# Altium PCB PCB_Heart-Earrings-1.5_2025-02-14.pcbdoc
Units mil, origin at the board's own origin, x right, y up, seen from the top; angles counter-clockwise.
Board outline 1885.82 x 2200.78 mil, 2 copper layers (Top Layer, Bottom Layer); 84 components, 34 nets, 213 pads, 61 vias.
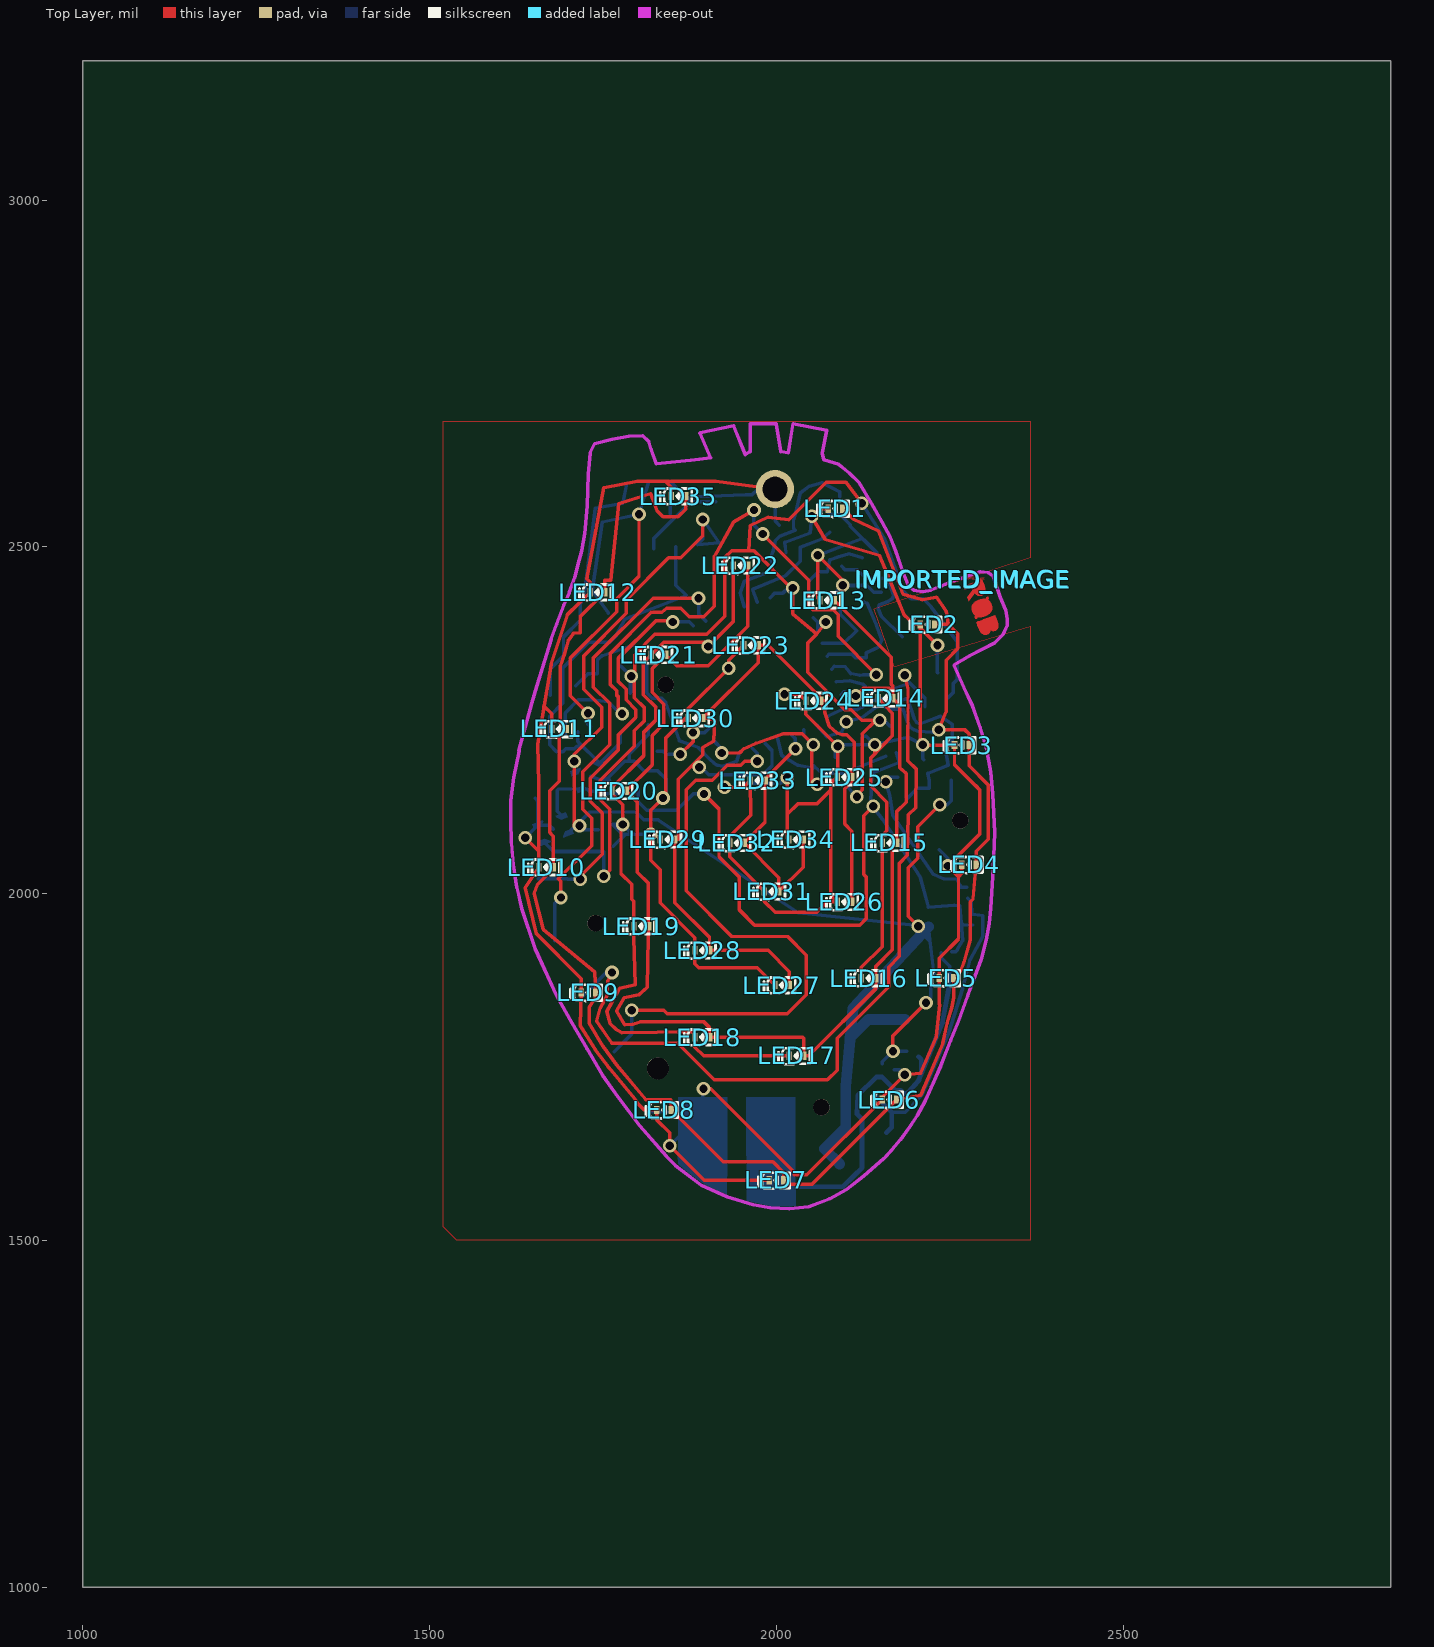
[diagram p0: Top Layer view]
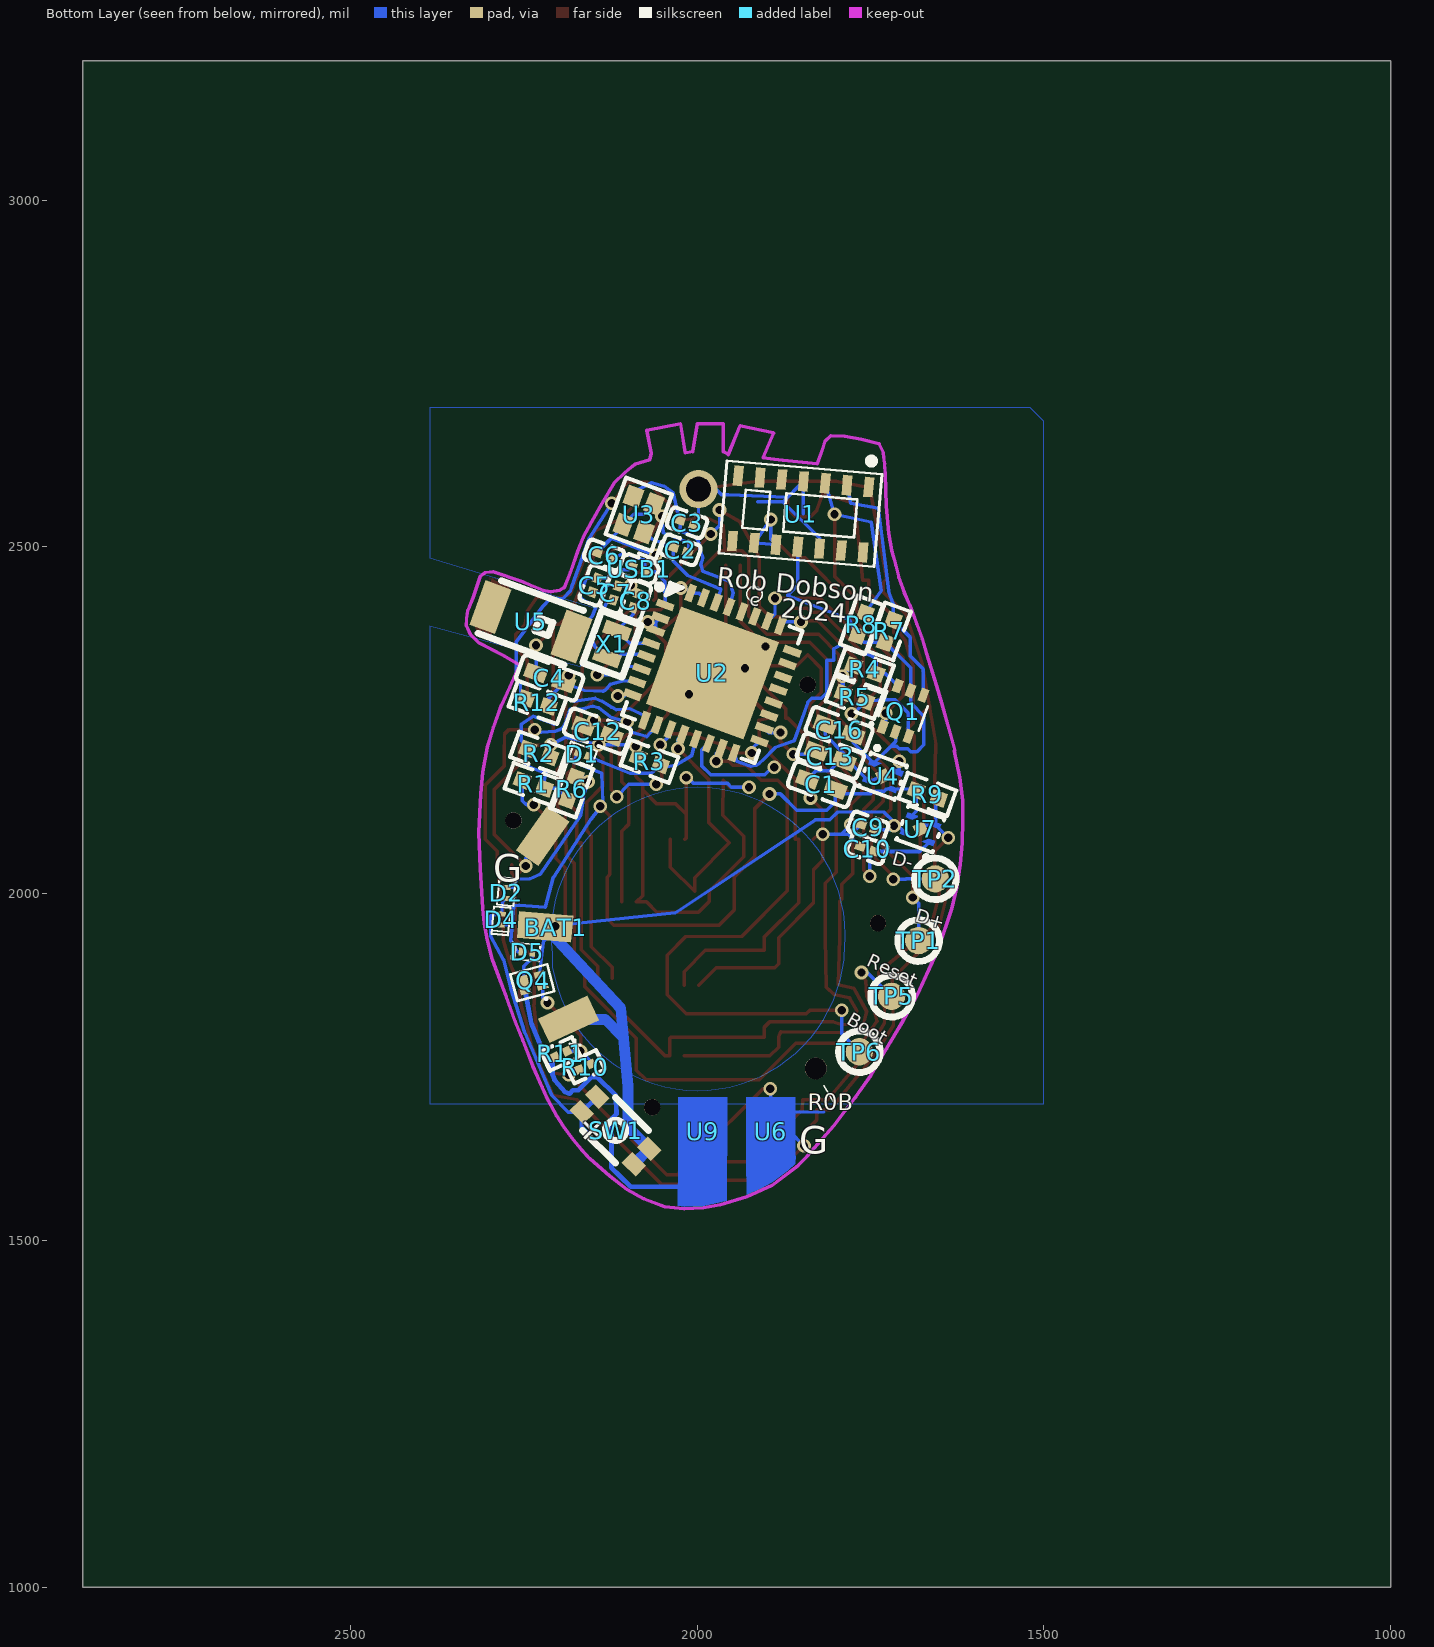
[diagram p1: Bottom Layer view, seen from below]

## Layer stack, top to bottom
Top Layer: signal copper (thickness not stored)
Dielectric: dielectric 12.6, FR-4, Dk 4.8
Bottom Layer: signal copper (thickness not stored)

## Board outline
2885.82,1000 1000,1000 1000,3200.78 2885.82,3200.78

## Components (designator, comment, footprint, x,y, rotation, side; value= is the part's Value field where it differs from the comment)
BAT1 "CP1154 li-ion" CP1154_LI_ION_NO_SILK 2000,1933.08 r95 bottom
C1 "1uF" C0402 1820.87,2157.48 r20 bottom
C2 "10pF" C0201 2024.02,2495.67 r200 bottom
C3 "10pF" C0201 2014.57,2534.64 r200 bottom
C4 "1uF" C0402 2212.6,2311.02 r20 bottom
C5 "10pF" C0201 2147.64,2444.49 r290 bottom
C6 "10pF" C0201 2134.25,2488.19 r20 bottom
C7 "10pF" C0201 2117.72,2433.46 r110 bottom
C8 "10pF" C0201 2088.58,2422.44 r290 bottom
C9 "1uF" C0201 1753.54,2096.06 r20 bottom
C10 "100nF" C0201 1754.72,2064.57 r20 bottom
C12 "100nF" C0402 2143.7,2234.25 r200 bottom
C13 "1uF" C0402 1808.11,2198.15 r200 bottom
C16 "1uF" C0402 1795.28,2236.22 r20 bottom
D1 "BAT30F4-MS" X3-DFN0603-2_L0.6-W0.3-RD 2165.35,2200.79 r20 bottom
D2 "BAT30F4-MS" X3-DFN0603-2_L0.6-W0.3-RD 2275.2,2001.18 r95 bottom
D4 "BAT30F4-MS" X3-DFN0603-2_L0.6-W0.3-RD 2282.68,1962.6 r275 bottom
D5 "BAT30F4-MS" X3-DFN0603-2_L0.6-W0.3-RD 2245.27,1915.75 r5 bottom
IMPORTED_IMAGE "IMPORTED_IMAGE" IMPORTED_IMAGE#1 2268.01,2454.02 r0 top
IMPORTED_IMAGE "IMPORTED_IMAGE" IMPORTED_IMAGE#2 2269.61,2452.82 r0 top
LED1 "XL-0201SURC" LED-SMD_L0.7-W0.4-RD 2085.04,2555.12 r0 top
LED2 "XL-0201SURC" LED-SMD_L0.7-W0.4-RD 2218.11,2388.15 r0 top
LED3 "XL-0201SURC" LED-SMD_L0.7-W0.4-RD 2267.32,2214.17 r0 top
LED4 "XL-0201SURC" LED-SMD_L0.7-W0.4-RD 2277.95,2041.73 r0 top
LED5 "XL-0201SURC" LED-SMD_L0.7-W0.4-RD 2245.27,1878.35 r0 top
LED6 "XL-0201SURC" LED-SMD_L0.7-W0.4-RD 2163.11,1703.15 r0 top
LED7 "XL-0201SURC" LED-SMD_L0.7-W0.4-RD 2000,1586.61 r0 top
LED8 "XL-0201SURC" LED-SMD_L0.7-W0.4-RD 1838.11,1688.15 r0 top
LED9 "XL-0201SURC" LED-SMD_L0.7-W0.4-RD 1729.13,1857.48 r0 top
LED10 "XL-0201SURC" LED-SMD_L0.7-W0.4-RD 1668.11,2038.15 r0 top
LED11 "XL-0201SURC" LED-SMD_L0.7-W0.4-RD 1686.61,2237.4 r0 top
LED12 "XL-0201SURC" LED-SMD_L0.7-W0.4-RD 1742.13,2434.64 r0 top
LED13 "XL-0201SURC" LED-SMD_L0.7-W0.4-RD 2073.11,2423.15 r0 top
LED14 "XL-0201SURC" LED-SMD_L0.7-W0.4-RD 2157.48,2281.49 r0 top
LED15 "XL-0201SURC" LED-SMD_L0.7-W0.4-RD 2163.11,2073.15 r0 top
LED16 "XL-0201SURC" LED-SMD_L0.7-W0.4-RD 2133.11,1878.15 r0 top
LED17 "XL-0201SURC" LED-SMD_L0.7-W0.4-RD 2029.13,1766.14 r0 top
LED18 "XL-0201SURC" LED-SMD_L0.7-W0.4-RD 1893.11,1793.15 r0 top
LED19 "XL-0201SURC" LED-SMD_L0.7-W0.4-RD 1805.12,1953.15 r0 top
LED20 "XL-0201SURC" LED-SMD_L0.7-W0.4-RD 1773.11,2148.15 r0 top
LED21 "XL-0201SURC" LED-SMD_L0.7-W0.4-RD 1830.31,2344.49 r0 top
LED22 "XL-0201SURC" LED-SMD_L0.7-W0.4-RD 1948.11,2473.15 r0 top
LED23 "XL-0201SURC" LED-SMD_L0.7-W0.4-RD 1963.11,2358.15 r0 top
LED24 "XL-0201SURC" LED-SMD_L0.7-W0.4-RD 2053.11,2278.15 r0 top
LED25 "XL-0201SURC" LED-SMD_L0.7-W0.4-RD 2098.11,2168.15 r0 top
LED26 "XL-0201SURC" LED-SMD_L0.7-W0.4-RD 2098.11,1988.15 r0 top
LED27 "XL-0201SURC" LED-SMD_L0.7-W0.4-RD 2008.11,1868.15 r0 top
LED28 "XL-0201SURC" LED-SMD_L0.7-W0.4-RD 1893.11,1918.15 r0 top
LED29 "XL-0201SURC" LED-SMD_L0.7-W0.4-RD 1843.11,2078.15 r0 top
LED30 "XL-0201SURC" LED-SMD_L0.7-W0.4-RD 1883.11,2253.15 r0 top
LED31 "XL-0201SURC" LED-SMD_L0.7-W0.4-RD 1993.11,2003.15 r0 top
LED32 "XL-0201SURC" LED-SMD_L0.7-W0.4-RD 1943.11,2073.15 r0 top
LED33 "XL-0201SURC" LED-SMD_L0.7-W0.4-RD 1973.11,2163.15 r0 top
LED34 "XL-0201SURC" LED-SMD_L0.7-W0.4-RD 2028.11,2078.15 r0 top
LED35 "XL-0201SURC" LED-SMD_L0.7-W0.4-RD 1858.66,2573.23 r0 top
Q1 "NTZD3154NT1G" SOT-563_L1.6-W1.2-P0.50-LS1.6-TL 1703.11,2263.15 r290 bottom
Q4 "DMP21D0UFB4-7B" X2-DFN1006-3_L1.0-W0.6-BR 2237.4,1871.65 r345 bottom
R1 "4.7MΩ" R0402 2236.22,2157.48 r200 bottom
R2 "2.2MΩ" R0402 2228.34,2202.75 r200 bottom
R3 "10kΩ" R0402 2068.9,2190.94 r20 bottom
R4 "10kΩ" R0402 1758.11,2323.15 r200 bottom
R5 "10kΩ" R0402 1773.11,2283.15 r200 bottom
R6 "2.2MΩ" R0402 2181.1,2151.57 r290 bottom
R7 "10kΩ" R0402 1723.11,2378.15 r110 bottom
R8 "10kΩ" R0402 1763.11,2388.15 r110 bottom
R9 "10MΩ" R0402 1668.11,2143.15 r200 bottom
R10 "10kΩ" R0201 2161.42,1750.39 r335 bottom
R11 "100kΩ" R0201 2196.45,1768.9 r155 bottom
R12 "10kΩ" R0402 2230.31,2275.59 r200 bottom
SW1 "SKTAAAE010" KEY-SMD_4P-L2.6-W1.6-P0.80-LS3.0 2117.72,1658.66 r225 bottom
TP1 "D+" TESTPAD0 1680.71,1932.28 r0 bottom
TP2 "D-" TESTPAD0 1656.69,2021.26 r0 bottom
TP5 "EN" TESTPAD0 1719.68,1851.97 r0 bottom
TP6 "9" TESTPAD0 1766.14,1772.05 r0 bottom
U1 "MAX30101EFD+T" OESIP-14_L5.6-W3.3-P0.80-TL 1850.79,2547.24 r95 bottom
U2 "ESP32-C3FH4" QFN-32_L5.0-W5.0-P0.50-TL-EP3.7 1978.11,2318.15 r20 bottom
U3 "40MHz" CRYSTAL-SMD_4P-L1.6-W1.2-BL 2084.25,2546.85 r290 bottom
U4 "NCP170AMX180TCG" XDFN-4_L1.0-W1.0-P0.65-BL-EP 1732.28,2169.29 r110 bottom
U5 "ANT3216LL00R2400A" ANT-SMD_L3.2-W1.6 2239.76,2391.73 r200 bottom
U6 "SLIDE_CONTACT" SLIDE_CONTACT 1893.7,1657.48 r0 bottom
U7 "NCP167BMX330TBG" XDFN-4_L1.0-W1.0-P0.65-BL-EP 1678.11,2093.15 r290 bottom
U9 "SLIDE_CONTACT" SLIDE_CONTACT 1992.12,1657.48 r0 bottom
USB1 "1nH" L0201 2083.86,2468.11 r20 bottom
X1 "32.768kHz" CRYSTAL-SMD_L1.7-W1.1 2122.83,2359.84 r290 bottom

## Footprints (in the part's own frame and the unit in brackets; to place one, negate y for a bottom-side part, rotate by r counter-clockwise, add the part's x,y. Pads: shape width x height; smd on the part's side, far side on the other; paste and mask are expansions set on the pad)
ANT-SMD_L3.2-W1.6 [mm]
  rect 1x1.75 smd paste+0 mask+0.051: 1(1.578,0) 2(-1.578,0)
  silkscreen extent -1.68,-1.06 1.68,1.05
C0201 [mil]
  rect 14.51x12.76 smd paste-3937.01 mask+2: 1(10.8,0) 2(-10.8,0)
  silkscreen extent -27,-15 27,15
C0402 [mm]
  rect 0.79x0.54 smd paste-100 mask+0.051: 1(0.545,0) 2(-0.545,0)
  silkscreen extent -1.17,-0.5 1.17,0.5
CP1154_LI_ION_NO_SILK [mm]
  rect 1x2 smd rot 30 paste+0 mask+0.051: 1(-3.302,4.445)
  rect 1x2 smd paste+0 mask+0.051: 1(0,5.588)
  rect 2x1 smd rot 150 paste+0 mask+0.051: 2(3.302,5.969)
  silkscreen extent -4.35,3.94 -4.03,4.32
CRYSTAL-SMD_4P-L1.6-W1.2-BL [mm]
  rect 0.73x0.6 smd paste+0 mask+0.05: 1(0.55,0.4) 2(-0.55,0.4) 3(-0.55,-0.4) 4(0.55,-0.4)
  silkscreen extent -1.1,-0.9 1.35,1.15
CRYSTAL-SMD_L1.7-W1.1 [mm]
  rect 0.5x1 smd paste+0 mask+0.05: 1(0.525,0) 2(-0.525,0)
  silkscreen extent -1.02,-0.76 1.02,0.76
IMPORTED_IMAGE#1 [mil]
IMPORTED_IMAGE#2 [mil]
  Top Layer region: 111 vertices and 2 holes, not listed, extent 18.84,-79.68 50.54,-51.5
  Top Layer region: 134 vertices and 2 holes, not listed, extent 11.76,-56.3 41.68,-24.88
  Top Layer region: 16.17,-19.4 7.93,-31.57 5.75,-25.59 13.6,-14.35 12.35,-10.93 1.81,-14.77 1.33,-13.47 1.03,-12.67 0.72,-11.82 0.42,-11.01 0.17,-10.3 0,-9.78 0.55,-9.57 1.57,-9.17 4.74,-7.92 6.75,-7.13 8.96,-6.27 11.29,-5.36 13.69,-4.44 16.07,-3.53 18.38,-2.67 20.55,-1.87 22.51,-1.18 24.19,-0.62 25.52,-0.22 26.44,0 26.87,0 27.17,-0.46 27.63,-1.44 28.18,-2.75 28.76,-4.22 29.31,-5.67 29.78,-6.93 30.23,-8.15 30.58,-9.17 30.89,-10.16 31.16,-11.13 31.38,-12.07 31.56,-12.97 31.69,-13.81 31.77,-14.61 31.79,-15.35 31.76,-16.02 31.69,-16.67 31.57,-17.29 31.42,-17.89 31.23,-18.47 31,-19.02 30.72,-19.54 30.41,-20.05 30.06,-20.52 29.66,-20.96 29.22,-21.37 28.74,-21.76 28.21,-22.11 27.64,-22.43 27.03,-22.73 26.37,-22.99 25.66,-23.22 24.96,-23.39 24.27,-23.5 23.59,-23.55 22.92,-23.54 22.25,-23.48 21.6,-23.35 20.95,-23.16 20.32,-22.92 19.7,-22.61 19.1,-22.23 18.5,-21.79 17.92,-21.29 17.35,-20.71 16.79,-20.07 16.25,-19.37 hole: 22920999.3,24344363.59 22927189.14,24344530.93 22927189.14,24344530.93 22933467.11,24345566.4 22933467.11,24345566.4 22939830.39,24347467.18 22939830.39,24347467.18 22945047.11,24349700.78 22945047.11,24349700.78 22949719.14,24352398.43 22949719.14,24352398.43 22953849.3,24355562.96 22953849.3,24355562.96 22957440.39,24359197.18 22957440.39,24359197.18 22960515.39,24363321.87 22960515.39,24363321.87 22962840.39,24368089.68 22962840.39,24368089.68 22964415.39,24373498.74 22964415.39,24373498.74 22965240.39,24379547.18 22965240.39,24379547.18 22965373.68,24383883.74 22965373.68,24383883.74 22965114.14,24388597.18 22965114.14,24388597.18 22964462.74,24393685.62 22964462.74,24393685.62 22963420.39,24399147.18 22963420.39,24399147.18 22962062.74,24405119.21 22962062.74,24405119.21 22960269.14,24411650.93 22960269.14,24411650.93 22958038.68,24418743.28 22958038.68,24418743.28 22955370.39,24426397.18 22955370.39,24426397.18 22942410.39,24461997.18 22942410.39,24461997.18 22859010.39,24431647.18 22859010.39,24431647.18 22867950.39,24406997.18 22867950.39,24406997.18 22871027.74,24398814.99 22871027.74,24398814.99 22874036.64,24391354.68 22874036.64,24391354.68 22876979.93,24384618.12 22876979.93,24384618.12 22879860.39,24378607.18 22879860.39,24378607.18 22882866.33,24373180.93 22882866.33,24373180.93 22885870.39,24368302.18 22885870.39,24368302.18 22888874.46,24363970.93 22888874.46,24363970.93 22891880.39,24360187.18 22891880.39,24360187.18 22897509.3,24354376.56 22897509.3,24354376.56 22903221.64,24349919.68 22903221.64,24349919.68 22909018.36,24346816.56 22909018.36,24346816.56 22914900.39,24345067.18 22914900.39,24345067.18 22920999.3,24344363.59
KEY-SMD_4P-L2.6-W1.6-P0.80-LS3.0 [mm]
  rect 0.72x0.55 smd paste+0 mask+0.051: 1(1.35,-0.4) 2(-1.35,-0.4) 3(1.35,0.4) 4(-1.35,0.4)
  silkscreen extent -0.85,-0.85 0.85,0.85
L0201 [mil]
  rect 14.51x12.76 smd paste-3937.01 mask+2: 1(10.8,0) 2(-10.8,0)
  silkscreen extent -27,-15 27,15
LED-SMD_L0.7-W0.4-RD [mil]
  rect 8x12 smd paste+0 mask+1.97: 1(-10.5,0) 2(10.5,0)
  silkscreen extent -26,-12 19,11
OESIP-14_L5.6-W3.3-P0.80-TL [mm]
  rect 0.75x0.35 smd paste+0 mask+0.05: 1(1.2,-2.4) 2(1.2,-1.6) 3(1.2,-0.8) 4(1.2,0) 5(1.2,0.8) 6(1.2,1.6) 7(1.2,2.4) 8(-1.2,2.4) 9(-1.2,1.6) 10(-1.2,0.8) 11(-1.2,0) 12(-1.2,-0.8) 13(-1.2,-1.6) 14(-1.2,-2.4)
  silkscreen extent -1.69,-2.84 2.28,2.86
QFN-32_L5.0-W5.0-P0.50-TL-EP3.7 [mm]
  rect 0.65x0.28 smd paste-100 mask+0.051: 1(2.478,-1.75) 2(2.478,-1.25) 3(2.478,-0.75) 4(2.478,-0.25) 5(2.478,0.25) 6(2.478,0.75) 7(2.478,1.25) 8(2.478,1.75) 17(-2.478,1.75) 18(-2.478,1.25) 19(-2.478,0.75) 20(-2.478,0.25) 21(-2.478,-0.25) 22(-2.478,-0.75) 23(-2.478,-1.25) 24(-2.478,-1.75)
  rect 0.28x0.65 smd paste-100 mask+0.051: 9(1.75,2.478) 10(1.25,2.478) 11(0.75,2.478) 12(0.25,2.478) 13(-0.25,2.478) 14(-0.75,2.478) 15(-1.25,2.478) 16(-1.75,2.478) 25(-1.75,-2.478) 26(-1.25,-2.478) 27(-0.75,-2.478) 28(-0.25,-2.478) 29(0.25,-2.478) 30(0.75,-2.478) 31(1.25,-2.478) 32(1.75,-2.478)
  rect 3.8x3.8 smd paste-100 mask+0.051: 33(0,0)
  silkscreen extent -2.58,-2.58 3,2.58
R0201 [mil]
  rect 11.93x12.76 smd paste-3937.01 mask+2: 1(9.51,0) 2(-9.51,0)
  silkscreen extent -24,-15 24,15
R0402 [mm]
  rect 0.566x0.54 smd paste-100 mask+0.051: 1(0.433,0) 2(-0.433,0)
  silkscreen extent -0.94,-0.5 0.94,0.5
SLIDE_CONTACT [mil]
  Top Layer region: 35.43,-49.21 -35.43,-49.21 -35.43,35.43 -25.59,49.21 25.59,49.21 35.43,35.43
SOT-563_L1.6-W1.2-P0.50-LS1.6-TL [mm]
  rect 0.5x0.3 smd paste+0 mask+0.051: 1(0.8,-0.5) 2(0.8,0) 3(0.8,0.5) 4(-0.8,0.5) 5(-0.8,0) 6(-0.8,-0.5)
  silkscreen extent -0.48,-0.99 0.9,0.79
TESTPAD0 [mm]
  round 1 smd paste+0 mask+0.051: 1(0,0)
  silkscreen extent -0.76,-0.76 0.76,0.76
X2-DFN1006-3_L1.0-W0.6-BR [mm]
  rect 0.4x0.25 smd paste+0 mask+0.051: 1(-0.325,0.225) 2(-0.325,-0.225)
  rect 0.4x0.7 smd paste+0 mask+0.051: 3(0.325,0)
  silkscreen extent -0.69,-0.51 0.71,0.73
X3-DFN0603-2_L0.6-W0.3-RD [mm]
  rect 0.2x0.3 smd paste+0 mask+0.051: 1(0.2,0) 2(-0.2,0)
  silkscreen extent -0.46,-0.3 0.55,0.3
XDFN-4_L1.0-W1.0-P0.65-BL-EP [mm]
  rect 0.45x0.45 smd rot 45 paste+0 mask+0.051: 5(0,0)
  Top Layer region: -0.425,0.65 -0.225,0.65 -0.225,0.4 -0.375,0.25 -0.425,0.25
  Top Layer region: 0.425,-0.65 0.225,-0.65 0.225,-0.4 0.375,-0.25 0.425,-0.25
  Top Layer region: -0.425,-0.65 -0.225,-0.65 -0.225,-0.4 -0.375,-0.25 -0.425,-0.25
  Top Layer region: 0.225,0.4 0.225,0.65 0.425,0.65 0.425,0.2 0.375,0.25
  silkscreen extent -0.66,-0.7 0.98,0.7

## Free pads (board coordinates)
  round 55.12 hole 35.43 slot 35.63 at 0 deg paste+0 mask+2: 1(1998.11,2583.15)
  round 23.62 hole 23.62 unplated paste+0: ""(1739.37,1957.48) ""(1840.53,2301.22) ""(2064.96,1692.13) ""(2264.96,2105.51)
  round 31.5 hole 31.5 unplated paste+0: ""(1829.12,1748.04)

## Via types
v1: diameter 19.69, hole 12.01, Top Layer to Bottom Layer, tented both sides, 61 vias

## Nets (pads, with @x,y where several pads share a name; then routed paths per layer and width w, separated by ;. In a path a pad name is that pad's centre, name@x,y a point inside that pad or via, vN(x,y) a via of type N, cw(c..) or ccw(c..) an arc to the next point about the centre after c; other vN are vias at no path point)
1.8V: C16.2 Q1.2 Q1.5 R7.2 R8.2 U1.11 | length 596
  Bottom Layer w5: Q1.2 1713.88,2219.33 1745.49,2187.72 1775.11,2217.34 C16.2 ; 1719.39,2213.82 1718.17,2212.6 1712.6,2212.6 1708.66,2208.66 1696.3,2208.66 1692.36,2204.72 1683.07,2204.72 1673.23,2214.57 1673.23,2255.9 1692.34,2275.01 Q1.5 1692.34,2325.54 R7.2 1758.94,2362.14 R8.2 1781.49,2395.67 1869.79,2429.92 1854.9,2444.82 U1.11 1854.9,2483.12
ANT: C6.2 U2.1 USB1.2 | length 133
  Bottom Layer w5: U2.1 2046.8,2450.38 2060.9,2464.38 USB1.2 2077.16,2481.1 2089.76,2485.82 2104.72,2490.16 C6.2
BOOT_IO9: TP6.1 U2.15 | length 890.9
  Top Layer w5: v1(1791.73,1831.89) 1837.39,1831.89 1842.5,1826.78 2015.7,1826.78 2043.3,1854.38 2043.3,1911.38 2016.5,1938.18 1935.9,1938.18 1870.1,2003.98 1870.1,2149.58 1883.9,2163.38 1907.5,2163.38 1929.2,2185.08 1948.8,2185.08 1954.7,2190.98 v1@1972.4,2190.98
  Bottom Layer w5: TP6.1 1791.73,1797.63 v1(1791.73,1831.89) ; U2.15 1972.44,2202.45 v1(1972.44,2190.94)
C13_2: C13.2 U2.18 | length 100.2
  Top Layer w5: v1(1861.42,2200.79) 1879.92,2219.29 v1(1879.92,2232.29)
  Bottom Layer w5: C13.2 1836.62,2205.49 1841.32,2200.79 v1(1861.42,2200.79) ; v1(1879.92,2232.29) 1897.03,2232.29 U2.18
CHG_IN: D5.2 Q4.3 R11.2 | length 671.9
  Bottom Layer w5: D5.2 2237.44,1907.44 2249.76,1895.12 Q4.3
  Bottom Layer w6.89: 1991.7,1657.48 1991.7,1577.48 2095.7,1577.48 2111.42,1592.91 2123.6,1605.08 2123.6,1674.78 2116.4,1681.98 2117.32,1709.45 2144.1,1735.48 2152.4,1735.48 2171.3,1716.48 2179.1,1716.48 2183.9,1711.48 2190.16,1713.78 2205.51,1731.1 2239.37,1813.38 Q4.3@2249.7,1868.48 ; R11.2 2208.75,1761.2 2208.75,1738.97
ESP32_EN: C4.2 R12.1 TP5.1 U2.7 | length 1315.1
  Top Layer w5: v1(1762.99,1886.22) 1757.1,1874.78 1755.7,1852.48 1745.7,1834.28 1740.7,1816.18 1762.7,1784.48 1857.7,1784.48 1910.7,1731.48 2073.7,1731.48 2087.7,1745.48 2087.7,1791.48 2161.8,1865.78 2161.8,1893.68 2177.4,1909.48 2177.4,2043.48 2188.7,2055.18 2190.16,2113.78 2200.79,2124.01 2201.97,2179.13 2189.37,2191.73 2189.76,2295.27 v1(2185.04,2314.96)
  Bottom Layer w5: TP5.1@1719.7,1851.48 1754.44,1886.22 v1(1762.99,1886.22) ; U2.7@2086.6,2305.48 2105.9,2306.68 2125,2301.98 2132.68,2293.3 2135.83,2291.73 2162.2,2292.88 C4.2 ; v1(2185.04,2314.96) 2185.04,2311.07 C4.2 2214.3,2281.81 R12.1
GND: BAT1.2 C1.1 C2.1 C3.1 C4.1 C5.1 C6.1 C7.1 C8.2 C9.1 C10.1 C12.1 C13.1 C16.1 LED1.1 LED2.1 LED3.1 LED4.1 LED5.1 LED6.1 LED7.1 LED8.1 LED9.1 LED10.1 LED11.1 LED12.1 LED13.1 LED14.1 LED15.1 LED16.1 LED17.1 LED18.1 LED19.1 LED20.1 LED21.1 LED22.1 LED23.1 LED24.1 LED25.1 LED26.1 LED27.1 LED28.1 LED29.1 LED30.1 LED31.1 LED32.1 LED33.1 LED34.1 LED35.1 pad.1 R2.1 R3.1 R9.1 R10.1 U1.4 U1.12 U2.33 U3.2 U3.4 U4.5 U7.5 | length 8312.1
  Top Layer w5: v1(1638.11,2080.74) 1657.61,2061.24 LED10.1 ; 1664.7,2270.48 1676.12,2259.06 LED11.1 ; v1(1818.9,2085.83) 1818.9,2047.98 1832.3,2034.68 1832.3,1986.58 1882.6,1936.28 LED28.1 ; LED8.1@1827.61,1688.15 1827.61,1673.65 1846.06,1655.2 v1(1846.06,1636.61) ; LED8.1@1827.7,1688.48 1809.1,1688.48 1799.7,1698.08 1795.7,1704.48 1757.9,1749.98 1740.55,1772.44 1716.93,1810.24 LED9.1 1718.63,1877.39 1653.54,1942.48 1637.7,2008.27 1657.7,2038.48 1657.7,2157.68 1655.7,2215.75 1675.2,2330.48 1698.82,2402.36 LED12.1 1731.63,2449.08 1726.77,2453.93 1751.18,2585.48 1799.7,2594.48 1912.6,2594.48 pad.1@1998.11,2583.15 ; LED29.1@1832.61,2078.15 1824.93,2085.83 v1(1818.9,2085.83) 1818.9,2120.08 v1(1836.61,2137.79) 1840.55,2141.73 1840.55,2224.41 1869.29,2253.15 1872.61,2253.15 1872.61,2266.31 v1(1931.1,2324.8) 1931.1,2336.64 LED23.1@1952.61,2358.15 ; 1839.7,2594.48 1848.16,2586.02 LED35.1 ; v1(1846.06,1636.61) 1896.1,1586.58 LED7.1 ; LED18.1@1882.61,1793.15 1882.61,1778.65 1895.12,1766.14 LED17.1 ; LED18.1 1879.5,1800.78 1776.77,1799.61 1768.11,1804.72 1760.24,1812.2 1755.51,1830.31 1774.02,1863.38 1796.85,1868.9 1794.6,1936.38 1794.6,1953.18 1794.6,1988.78 1791.3,1992.08 1791.3,2013.38 1776,2028.78 1776,2097.25 v1(1778.35,2099.6) 1778.35,2128.34 1762.6,2144.09 LED20.1 1762.6,2152.68 1809.1,2199.18 1809.1,2233.08 1826.4,2250.38 1826.4,2268.88 1808.3,2286.98 1808.3,2332.98 LED21.1 1837.52,2362.2 1901.57,2362.2 v1(1901.57,2356.3) ; LED28.1@1882.61,1918.15 1882.61,1898.65 1888.11,1893.15 1972.61,1893.15 LED27.1@1997.61,1868.15 ; v1(1894.88,1718.9) 1905.11,1718.9 2000,1624.02 2025.59,1598.42 2025.59,1594.49 2043.95,1594.49 LED6.1@2152.61,1703.15 ; v1(1901.57,2356.3) 1937.6,2392.28 LED22.1 ; v1(1925.2,2153.54) 1953,2153.54 1962.61,2163.15 1963.11,2113.15 1932.61,2082.65 1932.61,2073.15 1932.61,2053.15 1982.61,2003.15 1982.61,1988.65 1998.11,1973.15 2058.11,1973.15 2073.11,1988.15 2087.61,1988.15 2078.74,1997.02 2078.74,2149.6 ; v1(2011.81,2287.4) 2033.36,2287.4 LED24.1 2042.61,2258.57 v1(2088.58,2212.6) 2088.58,2169.29 2078.74,2159.45 2078.74,2149.6 ; 2015.75,2108.35 2015.75,2114.17 2031.49,2129.92 2059.06,2129.92 2078.74,2149.6 ; v1(2015.75,2167.32) 2015.75,2080.01 LED34.1@2017.61,2078.15 ; LED13.1 2059.86,2425.9 v1(2059.86,2487.67) 2095.67,2451.86 v1(2095.67,2444.49) ; LED1.1 2061.82,2555.12 v1(2050.79,2544.09) 2070.47,2510.63 2148.82,2487.4 2157.08,2467.71 2183.86,2402.48 2198.7,2388.48 LED2.1@2207.7,2388.48 ; LED25.1@2087.61,2168.15 2078.74,2159.28 2078.74,2149.6 ; LED16.1@2122.61,1878.15 2122.61,1893.65 2152.61,1923.65 LED15.1@2152.61,2073.15 ; 2137.8,2196.89 2141.73,2200.82 v1(2141.73,2214.56) ; LED14.1 2166.93,2259.84 2166.93,2227.56 2135.8,2194.88 2135.8,2155.48 2159.4,2131.88 2159.4,2090.58 2152.6,2083.68 LED15.1 ; LED6.1@2152.7,1703.15 2152.7,1706.64 v1(2185.04,1738.98) 2207.87,1740.94 2230.71,1794.09 2235.7,1840.16 2234.78,1840.48 LED5.1 2234.78,1906.83 2262.6,1934.65 2262.6,2024.4 ; v1(2232.28,2358.27) 2207.61,2382.94 LED2.1 2207.61,2217.97 v1(2211.02,2214.56) 2211.41,2214.17 LED3.1 ; v1(2247.24,2039.76) 2292.9,2085.48 2292.9,2149.58 2287,2155.88 2256.8,2186.08 LED3.1 ; v1(2247.24,2039.76) 2262.6,2024.4 ; LED4.1@2267.45,2041.73 2267.45,2029.26 2262.6,2024.4
  Bottom Layer w5: v1(1638.11,2080.74) 1656.15,2098.78 ; R9.1 1656.15,2133.27 1656.15,2098.78 ; U7.5@1678.11,2093.15 1672.48,2098.78 1656.15,2098.78 ; U4.5 1747.6,2163.66 1754.24,2163.66 1781.39,2190.81 C13.1 1795.41,2190.81 1809.06,2177.16 1828.69,2177.16 C1.1 1841.03,2142.21 v1(1836.61,2137.79) ; C10.1 1782.44,2085.83 v1(1818.9,2085.83) ; v1@1778.3,2099.58 1792.2,2085.78 ; v1@1778.35,2099.6 1778.19,2099.76 C9.1 1777.62,2085.83 1786,2085.83 ; C13.1 1787.9,2201.28 1815.4,2228.78 C16.1 ; 1817.43,1685.18 1866,1685.18 1893.7,1657.48 ; U1.12 1823.52,2512.1 1876.38,2564.96 1912.6,2564.96 1876.01,2564.96 U1.4 1846.95,2594.02 1846.95,2547.55 ; v1(1846.06,1636.61) 1866.93,1657.48 1893.7,1657.48 ; U1.4 1869.3,2571.68 1955.5,2574.78 1964.6,2574.78 1972.9,2583.18 pad.1 ; v1(1894.88,1718.9) 1893.7,1717.72 1893.7,1657.48 ; v1@1925.2,2153.58 1950.8,2153.58 1956.7,2159.48 2005.9,2159.48 2013.8,2167.28 v1(2015.75,2167.32) ; pad.1@1998.11,2583.15 1998.11,2537.26 C3.1 ; C2.1@2013.87,2491.48 2011.81,2506.3 2048.82,2520.08 v1(2050.79,2544.09) 2062.05,2555.35 2062.05,2561.81 2077.01,2546.85 2084.25,2546.85 2091.49,2546.85 U3.4 2106.45,2529.83 C6.1 ; v1@2057.09,2486.61 2123.7,2512.11 2130.59,2505.42 ; R3.1 2084.91,2208.93 v1(2088.58,2212.6) 2090.56,2214.58 v1(2141.73,2214.56) ; C8.2 2084.89,2433.71 v1(2095.67,2444.49) ; C12.1 2129.38,2226.91 v1(2141.73,2214.56) 2189.7,2225.48 v1(2211.02,2214.56) 2211.02,2194.3 R2.1@2212.33,2192.99 ; C5.1 2140.24,2434.34 2130.09,2444.49 v1(2095.67,2444.49) ; R10.1 2177.65,1746.37 v1(2185.04,1738.98) ; v1(2232.28,2358.27) 2232.28,2318.84 C4.1 ; BAT1.2@2235,2063.08 2247.24,2050.84 v1(2247.24,2039.76) ; v1(2095.67,2444.49) 2096.55,2443.61 C7.1 2113.14,2444.49 v1(2095.67,2444.49)
LEDS_1: LED1.2 LED2.2 LED3.2 LED4.2 LED5.2 LED6.2 LED7.2 LED8.2 LED9.2 LED10.2 LED11.2 LED12.2 LED35.2 U2.10 | length 2939.4
  Top Layer w5: LED10.2 1678.6,2082.68 1673.1,2088.18 1673.1,2148.18 1687,2162.08 1687,2227.28 LED11.2 1688.7,2245.82 1688.7,2328.78 1694.88,2346.85 1700.2,2365.18 1707.48,2375.2 1716.93,2375.98 1716.93,2398.95 LED12.2 1752.62,2451.68 1761.4,2451.68 1772.83,2562.2 1818.9,2576.78 1827.9,2552.08 1836.6,2543.28 1858.2,2543.28 1869.2,2554.28 LED35.2 ; LED10.2@1678.7,2038.48 1678.7,2036.48 1655.7,2013.48 1650.7,1999.48 1663.7,1948.48 1738.19,1887.01 LED9.2 1739.37,1850.39 1729.92,1835.83 1729.92,1813.38 1750,1779.92 1769.7,1753.48 1811.81,1703.15 1847.7,1703.15 LED8.2@1848.7,1688.48 ; LED8.2 1923.6,1613.18 1995.1,1613.18 2010.5,1597.78 LED7.2 2016.4,1580.71 2051.17,1580.71 LED6.2 ; LED1.2 2110.63,2540.16 2147.24,2522.83 2182.7,2431.88 2210.2,2423.48 2230.7,2427.56 2244.7,2407.48 2247.7,2388.48 ; LED6.2@2173.7,1703.15 2208.27,1709.45 2240.16,1784.25 2246.06,1812.99 2252.75,1835.43 2255.78,1850.27 2255.78,1878.35 2265.35,1887.8 2270.47,1901.18 2279.5,1933.08 2279.5,1988.48 2283.5,1992.08 2288.19,2045.27 2288.45,2056.48 2288.45,2041.73 2288.45,2061.15 2305.51,2078.21 2305.51,2156.69 2277.82,2184.38 LED3.2 ; LED2.2 2247.6,2388.18 2261.8,2373.98 2261.8,2353.48 2244.7,2336.48 2244.7,2262.18 v1(2234.25,2236.22) 2271.3,2236.58 2277.8,2230.08 LED3.2
  Bottom Layer w5: U2.10@2057.7,2243.48 2072.7,2226.44 2094.09,2232.68 v1(2100.79,2247.64) 2122.7,2253.48 2141.7,2267.71 2150.78,2270.48 2167.32,2265.75 2183.07,2265.75 2188.7,2248.48 ; 2188.97,2248.03 2192.91,2240.16 2198.82,2236.22 2204.72,2234.25 2234.25,2232.28 v1(2234.25,2236.22)
LEDS_2: LED13.2 LED14.2 LED15.2 LED16.2 LED17.2 LED18.2 LED19.2 LED20.2 LED21.2 LED22.2 U2.8 | length 2014.2
  Top Layer w5: LED18.2@1903.61,1793.15 2038.11,1793.15 2039.63,1791.63 LED17.2 2046.46,1766.14 2143.6,1863.28 LED16.2 2143.6,1895.58 2167.3,1919.28 2167.3,2073.18 LED15.2 2173.6,2118.48 2187,2131.88 2187,2173.18 2177.95,2181.49 2177.95,2269.68 LED14.2 ; LED18.2 1903.6,1806.98 1895.7,1814.98 1803.6,1814.98 1792.91,1811.81 1781.1,1811.02 1769.68,1830.71 1780.31,1849.61 1801.57,1853.94 1813.78,1864.96 1815.6,1937.28 1815.6,1953.18 1815.6,2015.08 1799.6,2031.08 1799.6,2132.18 LED20.2 1820.9,2185.48 1820.9,2227.98 1837.8,2244.88 1837.8,2273.22 1820.9,2290.12 1820.9,2324.58 LED21.2 1856.5,2328.78 1901.6,2328.78 1958.6,2385.78 LED22.2 ; LED13.2 2165.7,2340.98 2165.7,2301.58 2168,2299.38 LED14.2 ; v1@2114.6,2285.08 2125.6,2296.08 2162.6,2296.08 2168,2290.68 LED14.2
  Bottom Layer w5: U2.8 2097.9,2291.38 2104.24,2285.04 v1(2114.57,2285.04)
LEDS_3: LED23.2 LED24.2 LED25.2 LED26.2 LED27.2 LED28.2 LED29.2 LED30.2 U2.14 | length 1303.1
  Top Layer w5: 1877.99,2184.67 1880.38,2182.28 v1(1888.98,2182.28) ; LED30.2@1893.61,2253.15 1973.61,2333.15 1973.61,2358.15 1988.11,2358.15 2068.11,2278.15 LED24.2@2063.61,2278.15 ; LED30.2 1911.4,2249.98 1910,2220.08 1893.7,2210.58 1893.7,2200.38 1858.3,2164.98 1858.3,2078.18 LED29.2 1853.6,1986.98 1903.6,1936.98 LED28.2 ; LED28.2@1903.61,1918.15 1988.11,1918.15 2018.61,1887.65 LED27.2@2018.61,1868.15 ; LED24.2 2069.6,2263.88 2069.6,2261.18 2076.38,2241.34 2087.4,2231.49 2095,2229.08 2101.7,2229.08 2112.2,2218.48 2112.2,2181.08 2108.6,2177.48 LED25.2 2108.6,2161.58 2098.4,2151.38 2098.4,2100.38 2108.6,2089.68 LED26.2
  Bottom Layer w5: v1(1888.98,2182.28) 1891.34,2182.28 1902.36,2171.26 1980.31,2171.26 1993.7,2184.64 1993.7,2206.41 U2.14
LEDS_4: LED31.2 LED32.2 LED33.2 LED34.2 U2.12 | length 370.4
  Top Layer w5: v1(2027.56,2208.66) 1983.61,2164.71 1983.61,2163.15 1983.61,2103.15 1953.61,2073.15 2003.61,2023.15 2003.61,2003.15 2038.61,2038.15 LED34.2@2038.61,2078.15
  Bottom Layer w5: U2.12 2027.56,2223.01 v1(2027.56,2208.66)
NULL: 
PWR_BTN: D2.1 R6.2 | length 230.9
  Bottom Layer w5: v1(2157.48,2161.42) 2163.65,2167.59 R6.2 ; v1@2157.5,2161.48 2163.7,2141.48 2167.7,2113.48 2225.9,2028.28 2241.34,2021.26 2260.2,2020.48 2264.9,2011.88 2264.9,2008.98 D2.1
PWR_CTRL: D1.2 R3.2 U2.13 | length 192.3
  Bottom Layer w5: U2.13 2007.87,2198.82 2031.49,2185.04 2052.9,2181.08 R3.2 2054.94,2183.07 2066.93,2173.23 2096.46,2173.23 D1.2
PWR_EN: C1.2 D1.1 D4.1 D5.1 R9.2 | length 1257.1
  Top Layer w5: v1(1895.67,2143.7) 1917.3,2122.07 1917.3,2053.18 1946.8,2023.58 1946.8,1976.38 1968.5,1954.68 2120.1,1954.68 2129.9,1964.58 2129.9,2023.58 2126,2027.58 2126,2112.18 v1(2139.76,2125.98)
  Bottom Layer w5: 1691.3,2111.57 1684.12,2118.75 R9.2 1686.02,2150.87 1719.09,2150.87 1727.09,2150.87 1730.32,2147.64 1746.85,2147.64 1750.79,2143.7 1794.26,2143.7 C1.2 ; C1.2@1800.7,2150.18 1800.7,2132.38 1813,2120.08 1856.3,2120.08 1879.9,2143.68 v1(1895.67,2143.7) ; D1.1 2177.2,2188.98 2137.7,2173.48 2135.8,2129.48 2153.1,2107.48 2207.5,2023.48 2219.3,1980.48 2256.7,1983.48 2264.7,1982.28 2268.5,1932.28 2260.63,1918.5 2258.56,1916.43 D5.1 ; 2266.24,1957.64 2269.12,1954.76 D4.1@2283.36,1954.76
Q4_1: Q4.1 R10.2 R11.1 | length 180.5
  Top Layer w5: v1(2168.11,1772.83) 2168.11,1795.28 v1(2215.74,1842.91)
  Bottom Layer w5: R10.2 2152.8,1757.52 v1(2168.11,1772.83) ; v1(2215.74,1842.91) 2222.75,1849.92 Q4.1@2222.75,1866.41 ; v1(2168.11,1772.83) 2187.75,1772.83 R11.1 2168.2,1772.92 v1(2168.11,1772.83)
S$4252: 
S$4256: 
S$6966817811473577: 
SCL: Q1.3 R5.1 U2.6 | length 975.1
  Top Layer w5: v1@1777.7,2259.48 1771.7,2265.78 1771.7,2284.48 1769.9,2285.48 1769.9,2292.48 1760.2,2301.48 1760.2,2345.98 1819.7,2405.48 1835,2405.48 1841.7,2411.48 1862.1,2411.48 1874.4,2399.18 1895.3,2399.18 1910.6,2414.58 1910.6,2486.18 1938.6,2536.18 v1(1967.72,2553.15) ; v1(1980.31,2518.5) 1980.31,2518.11 2046.46,2451.97 2046.46,2415.35 2052.36,2409.45 2081.89,2409.45 2088.98,2402.36 2088.98,2370.86 v1@2144.09,2315.75
  Bottom Layer w5: Q1.3 1695.4,2260.38 1714.6,2279.48 1734.3,2279.48 1752.2,2277.28 R5.1 1774.97,2259.45 v1(1777.56,2259.45) ; v1@1967.72,2553.15 1967.72,2531.1 v1(1980.31,2518.5) ; U2.6 2083.7,2327.58 2099.2,2326.78 2107.48,2317.32 2120.47,2314.57 2125.59,2315.75 2129.5,2315.78 v1(2144.09,2315.75)
SCL1.8: Q1.4 R7.1 U1.2 | length 357.1
  Bottom Layer w5: Q1.4 1673.83,2323.87 1693.11,2343.15 1693.11,2369.99 R7.1 1717.28,2417.32 1724.02,2436.22 1738.58,2555.51 1778.74,2562.6 U1.2
SDA: Q1.6 R4.1 U2.16 | length 399.9
  Bottom Layer w5: Q1.6 1728.67,2317.32 R4.1 1742.1,2337.14 1748.11,2343.15 ; 1748,2342.48 1793.3,2358.28 1803.4,2352.78 1803.4,2336.38 1813,2336.38 1813,2289.38 1820.9,2281.48 1834.9,2281.48 1840.3,2276.08 1860.2,2220.48 1887.8,2210.58 1904.72,2192.91 1909.45,2188.58 1915.35,2185.04 1922.83,2183.86 1927.2,2185.08 1942.9,2190.98 U2.16@1946.7,2202.98
SDA1.8: Q1.1 R8.1 U1.3 | length 600
  Top Layer w5: v1@1728.3,2259.88 1703.1,2285.08 1703.1,2339.68 1769.7,2406.28 1769.7,2425.18 1801.97,2457.45 v1(1801.97,2546.85)
  Bottom Layer w5: v1(1728.35,2259.84) 1728.35,2244.31 Q1.1 ; R8.1@1757.7,2404.48 1734.6,2436.58 1749.21,2535.82 v1(1801.97,2546.85) U1.3
SW1_2: D2.2 D4.2 SW1.2 SW1.4 | length 435.4
  Bottom Layer w5: SW1.2 2185.89,1685.11 2209.7,1709.48 2248.42,1799.61 2268.89,1863.78 2279.1,1904.48 2297.7,1938.98 2297.7,1968.48 D4.2 2280.7,1988.48 D2.2@2275.7,1993.48
  Bottom Layer w6.89: SW1.4 SW1.2 2166.44,1662.89 2158.67,1655.12
TP1_1: TP1.1 U2.26 | length 688.4
  Top Layer w5: v1(1689.37,1994.49) 1689.37,2017.61 1685.8,2021.18 1733.9,2069.28 1733.9,2108.58 1720.9,2121.58 1720.9,2175.78 1759.7,2214.58 1759.7,2274.48 1736.2,2297.68 1736.2,2339.78 1822.4,2425.98 v1@1887.7,2425.98
  Bottom Layer w5: TP1.1 1680.7,1985.82 v1(1689.37,1994.49) ; v1(1887.8,2425.98) 1887.8,2403.68 U2.26
TP2_1: TP2.1 U2.25 | length 571.1
  Top Layer w5: v1(1717.32,2020.86) 1717.32,2025.2 1748.8,2056.68 1748.8,2116.18 1731.5,2133.48 1731.5,2166.28 1771.7,2206.48 1771.7,2228.48 1797.2,2253.98 1797.2,2265.38 1783.5,2279.48 1783.5,2294.48 1771.7,2306.28 1771.7,2338.98 1826.4,2393.68 1848.7,2393.68 v1@1850.4,2391.48
  Bottom Layer w5: TP2.1 1698.82,2021.26 1699.22,2020.86 v1(1717.32,2020.86) ; v1(1850.39,2391.73) 1874.52,2391.73 U2.25
U5_1: C5.2 U5.1 USB1.1 | length 185.2
  Bottom Layer w5: USB1.1 2098.5,2467.28 2116.1,2467.28 2128.8,2454.68 C5.2@2143.9,2454.68 ; C5.2@2143.94,2454.48 2159.84,2454.72 2169.29,2430.31 2166.93,2424.8 2160.24,2420.86 2148.42,2416.53 2146.85,2411.02 2151.18,2400 U5.1
VBAT: BAT1.1 C9.2 Q4.2 R1.2 SW1.1 SW1.3 U1.9 U1.10 | length 2138.4
  Top Layer w5: v1@1716.1,2097.68 1708.7,2097.68 1708.7,2190.98 1708.7,2200.78 1748,2240.08 1748,2268.58 1722,2294.48 1722,2342.48 1783.5,2403.98 1783.5,2423.18 1844.5,2484.28 1862.2,2484.28 1894.09,2516.17 v1(1894.09,2539.37) ; v1(2204.72,1952.75) 2190.16,1967.32 2190.16,2037.4 2203.78,2051.03 2203.78,2096.3 v1(2235.43,2127.95)
  Bottom Layer w5: 1700.07,2087.52 1710.19,2097.64 v1(1716.14,2097.64) 1721.41,2092.37 C9.2 ; v1(1708.66,2190.94) 1708.66,2176.58 1710.32,2174.92 ; v1@1716.1,2097.68 1716.1,2102.78 1731.1,2117.68 1797.3,2117.68 1808.7,2106.28 1829.5,2106.28 2031.49,1972.44 BAT1.1@2219.16,1952.25 ; v1(2204.72,1952.75) 2204.72,1948.36 BAT1.1@2220,1933.08 ; BAT1.1@2219.2,1952.28 Q4.2 ; v1(2235.43,2127.95) 2246.06,2127.95 2252.23,2134.12 R1.2 ; U1.10 1894.09,2510.74 v1(1894.09,2539.37) U1.9 U1.10
  Bottom Layer w15.75: SW1.1@2091.3,1609.98 SW1.3 2100,1663.18 2100,1722.48 2110.24,1834.64 BAT1.1@2219.16,1952.25 ; 2106.4,1792.63 2132.59,1818.83 BAT1.1@2185.66,1818.83
VDD: C10.2 C12.2 R4.2 R5.2 R12.2 U2.2 U2.3 U2.11 U2.17 U2.31 U2.32 | length 2446
  Top Layer w5: v1(1751.18,2025.2) 1759.84,2033.86 1759.84,2121.65 1746.1,2135.39 1746.1,2163.38 1795.3,2212.58 1795.3,2234.67 1809.84,2249.21 1809.84,2268.11 1795.3,2282.65 1795.3,2308.63 v1(1790.55,2313.38) ; v1@1790.6,2313.48 1790.6,2319.58 1795.7,2319.58 1795.7,2344.48 1824.7,2373.98 1899.6,2373.98 1925.6,2399.98 1925.6,2484.68 1935.4,2494.48 1967.7,2494.48 ; v1(1921.26,2202.75) 1946.85,2202.75 1952.76,2208.66 1970.47,2216.53 2009.84,2230.31 2037.4,2230.31 v1(2053.15,2214.56) 2051.18,2212.59 2051.18,2157.48 v1(2059.05,2157.48) ; v1(2023.62,2440.55) 2023.6,2403.18 2058.2,2374.38 ; v1@2023.7,2440.48 2021.7,2440.48 1967.7,2494.48 ; v1@2071.3,2391.78 2058.2,2374.38 ; v1(2116.14,2139.76) 2116.1,2141.68 2124,2149.58 2124,2230.3 2143.7,2250 v1(2148.82,2250) 2123.23,2250 2107.87,2265.35 2098.42,2265.35 2045.3,2319.28 2045.3,2361.38 2058.2,2374.38 ; v1(2123.23,2562.6) 2100.39,2592.91 2072,2592.88 2018.1,2538.98 1988.2,2542.88 1962.2,2530.68 1960.2,2494.48 1967.7,2494.48
  Bottom Layer w5: C10.2 1678.76,2060.87 1664.91,2074.72 1679,2060.63 1751.18,2060.63 v1(1751.18,2025.2) ; R4.2 1774.95,2328.98 v1(1790.55,2313.38) ; U2.17 1921.26,2208.8 v1(1921.26,2202.75) ; U2.31 1997.73,2433.37 U2.32 2016.67,2440.55 v1(2023.62,2440.55) ; U2.11 2039.22,2228.49 v1(2053.15,2214.56) ; U2.2 2059.67,2391.02 U2.3 2071.26,2390.85 v1(2071.26,2391.73) ; v1(2059.05,2157.48) 2098.4,2157.48 v1(2116.14,2139.76) ; v1(2123.23,2562.6) 2155.51,2512.6 2180.71,2442.52 2182.69,2436.6 2194.09,2425.2 2211.62,2425.2 2223.07,2413.74 2261,2362.48 2261,2308.68 2254.7,2302.48 2254.7,2289.78 R12.2@2246.7,2281.48 ; v1(2148.82,2250) 2155.46,2250 C12.2 ; v1(1790.55,2313.38) 1789.12,2311.95 R5.2 1790.55,2290.41 v1(1790.55,2313.38)
VSENSE: R1.1 R2.2 R6.1 U2.9 | length 373.8
  Bottom Layer w5: U2.9@2074.8,2255.88 2097.64,2266.93 2116.93,2265.35 2123.62,2268.9 2136.61,2277.16 2147,2281.48 2177.2,2277.58 2189,2281.48 2198.8,2251.98 2202.8,2246.08 2207,2244.48 2236.2,2255.88 2253.9,2244.08 2253.9,2220.48 2244.4,2210.88 2244.4,2204.68 2248,2185.08 2218.5,2173.23 2220.2,2163.08 R1.1 ; R6.1 2203.02,2151.65 R1.1
XTAL_32K_N: C7.2 U2.5 X1.1 | length 164.6
  Bottom Layer w5: U2.5 2075.75,2344.88 2109.05,2344.88 2113.52,2340.42 X1.1 2129.9,2347.22 2146.85,2355.12 2151.97,2365.75 2143.7,2388.19 2131.1,2418.5 C7.2
XTAL_32K_P: C8.1 U2.4 X1.2 | length 99.8
  Bottom Layer w5: U2.4 2097.26,2360.76 X1.2 2092.28,2402.75 C8.1
XTAL_N: C3.2 U2.29 U3.3 | length 285
  Bottom Layer w5: U2.29@1953.7,2413.48 1948.03,2433.48 1953.7,2450.48 1991.7,2464.98 1994.9,2474.38 1991.7,2484.48 1995.67,2494.49 1998.42,2508.66 2005.12,2515.35 2027.16,2524.01 2024.71,2526.47 C3.2 2028.03,2548.91 2034.64,2577.56 2047.7,2587.48 2065.75,2592.48 2091.6,2579.18 U3.3@2091.6,2572.48
XTAL_P: C2.2 U2.30 U3.1 | length 170
  Bottom Layer w5: U2.30 1965.7,2438.98 2013.8,2458.68 2034.2,2479.08 C2.2 ; C2.2 2065.75,2511.41 U3.1
pads on no net: U1.1 U1.5 U1.6 U1.7 U1.8 U1.13 U1.14 U2.19 U2.20 U2.21 U2.22 U2.23 U2.24 U2.27 U2.28 U5.2

## Polygon pours and split planes (outlines as drawn)
GND on Top Layer (solid): 1519.68,2681.1 2366.14,2681.1 2366.14,2484.25 2140.16,2410.23 2169.29,2326.77 2366.14,2385.82 2366.14,1500 1539.37,1500 1519.68,1519.68 1519.68,2681.1
GND on Bottom Layer (solid): 1500,1736.22 1500,2681.1 1519.68,2700.78 2385.82,2700.78 2385.82,2484.25 2140.16,2410.23 2169.29,2326.77 2385.82,2385.82 2385.82,1696.85 1500,1696.85 1500,1716.54
VBAT on Bottom Layer (solid): 2000,1716.14 cw(c2000,1929.35) 1788.19,1904.94 1787.01,1926.99 cw(c1999.41,1940.37) 1786.59,1940.38 cw(c1999.41,1940.38) 1999.41,2153.2 cw(c1997.56,1940.38) 2208.66,1913.38 2208.66,1893.7 cw(c1998.45,1929.35) 2000,1716.14

## Other copper
Bottom Layer:
  region net GND: 1929.13,1617.98 1928.74,1566.14 1907.87,1575.2 1891.73,1583.86 1868.5,1601.18 1858.27,1610.24 1857.87,1622.05 1868.11,1608.27 1919.68,1608.27 1929.13,1621.65 1929.13,1621.26
  region net CHG_IN: 1957.09,1621.65 1957.09,1557.48 1992.12,1549.61 2018.9,1548.42 2027.95,1550 2027.56,1614.57 2027.16,1618.9 2027.16,1621.65

## Silkscreen, mask and mechanical layers (free items; w line width, h text height)
Bottom Overlay:
  circle w2.36: c1917.32,2431.89 r11.14
  lines w2.36 net NULL: 1803.94,1700.39 1817.71,1723.23
  text "Rob Dobson" at 1972.7,2444.17 h27.56 r6
  text "c" at 1925.27,2415.39 h19.68 r5
  text "2024" at 1879.94,2398.47 h27.56 r5
  text "D-" at 1719.87,2042.46 h19.68 r15
  text "G" at 2293.7,2017.33 h39.37
  text "D+" at 1686.96,1959.83 h19.68 r16
  text "Reset" at 1756.92,1896.98 h19.68 r25
  text "Boot" at 1786.02,1813.13 h19.68 r30
  text "R0B" at 1840.55,1687.4 h23.62
  text "+" at 2154.98,1630.96 h39.37 r315
  text "G" at 1852.76,1624.81 h39.37
Bottom Solder:
  region net GND: 1930.71,1602.36 1930.31,1562.6 1911.81,1570.47 1900,1575.98 1881.1,1588.58 1866.54,1599.61 1856.69,1608.66 1856.3,1624.8 1868.11,1608.66 1920.08,1608.66 1930.68,1624.32 1931.1,1602.76 1930.31,1602.36
  region net CHG_IN: 1955.12,1622.05 1954.72,1554.33 1991.73,1545.28 2018.5,1544.1 2030.31,1546.46 2029.53,1603.15 2029.13,1616.14 2029.13,1622.83
Document:
  circle w1.97: c1739.37,1957.48 r19.69
  circle w1.97: c1840.53,2301.22 r19.69